# EAGLE board Little-Wire (EAGLE 6.5.0)
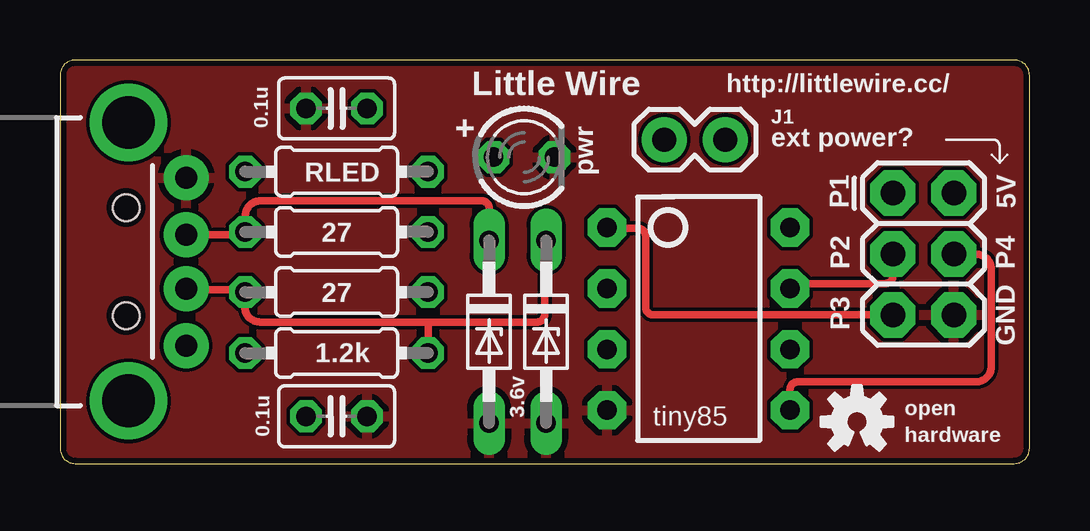
[diagram p0: board, top side]
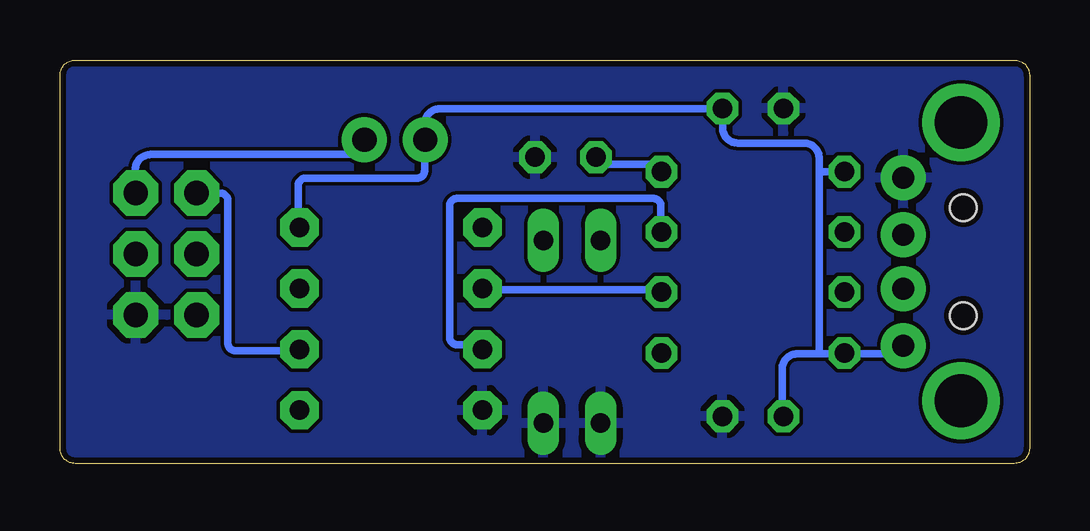
[diagram p1: board, bottom side, seen from below]

Size 40.4 x 16.82 mm. Coordinates in mm from the lower left corner, seen from the top.
Outline: 39.76,0 arc90 40.4,0.64 40.4,16.18 arc90 39.76,16.82 0.64,16.82 arc90 0,16.18 0,0.64 arc90 0.64,0 39.76,0
Copper layers (1*16): Top 0.0356mm / dielectric 1.5011mm / Bottom 0.0356mm
Design rules "OSHPark *": minimum track width 12mil, minimum drill 13mil, track to track 6mil, track to pad 6mil, pad to pad 6mil, via to via 6mil, smd to smd 6mil, copper to edge 10mil, drill to drill 6mil, minimum pad ring 10mil, minimum via ring 7mil, stop-mask expansion 3mil, vias tented up to drill 0mil, thermal gap 10mil
vRestrict: area 16.8,3.9 to 21.3,7.1; area 18.7,1.9 to 19.5,3.8; area 24.6,1.2 to 28.7,2.7; area 24.5,9 to 26.2,10.7; area 31.9,0.5 to 39.6,3.3; area 39,4.8 to 39.8,7.1; area 39,8.1 to 39.7,9.4; area 38.9,10.6 to 39.9,12; area 32.1,10.5 to 33.3,12.1; area 32.1,8 to 33,9.5; area 32.1,5.5 to 32.9,6.9; area 29.6,14.1 to 30.6,14.9; 8 more areas

## Footprints (pad centres in the part's own frame; a part is rotated, then mirrored left to right if it is on the bottom)
C025-025X050 = drill 0.813 octagon: 1 -1.27,0; 2 1.27,0
DO34Z7 = drill 0.813 long: A 3.81,0; C -3.81,0
2X3 = drill 1.016 pad 1.88 octagon: 1 0,0; 2 0,2.54; 3 2.54,0; 4 2.54,2.54; 5 5.08,0; 6 5.08,2.54
1X02 = drill 1.016 pad 1.88: 1 0,0; 2 2.54,0
LED3MM = drill 0.813 octagon: A -1.27,0; K 1.27,0
0204/7 = drill 0.813 octagon: 1 -3.81,0; 2 3.81,0
DIP08 = drill 0.813 pad 1.6 octagon: 1 -3.81,-3.81; 2 -1.27,-3.81; 3 1.27,-3.81; 4 3.81,-3.81; 5 3.81,3.81; 6 1.27,3.81; 7 -1.27,3.81; 8 -3.81,3.81
USB-A-H = drill 0.914 pad 1.88: D+ 2.4,1.127; D- 2.4,-1.127; GND 2.4,3.5; VBUS 2.4,-3.5 | drill 2.2: GND2 0,-5.8; GND3 0,5.8 | hole 1.1: -0.1,2.25; -0.1,-2.25

## Placement (x,y rotation side)
C1  100n  [C025-025X050]  11.53,14.8 0 top
C2  100n  [C025-025X050]  11.53,1.97 180 top
D1  3.6V  [DO34Z7]  17.88,5.49 270 top
D2  3.6V  [DO34Z7]  20.26,5.49 270 top
J1  AVR_SPI_PRG_6PTH  [2X3]  34.7,11.27 270 top
JP1  [1X02]  25.18,13.49 0 top
LED1  [LED3MM]  19.34,12.76 0 top
R1  27  [0204/7]  11.53,9.65 0 top
R2  27  [0204/7]  11.53,7.14 0 top
R3  1.2k  [0204/7]  11.53,4.6 180 top
R4  150  [0204/7]  11.53,12.16 180 top
U$1  OSHW-LOGOS  [OSHW-LOGO-S]  33.21,1.75 0 top
UC  ATTINY45DIP8  [DIP08]  26.61,6.03 270 top
X1  USB-A-H  [USB-A-H]  2.86,8.41 0 top

## Library data of the parts
C1 C2 = rcl
D1 D2 = diode
J1 JP1 U$1 UC X1 = SparkFun
LED1 = led
R1-R4 = resistor

## Nets
D+: D1.C R1.1 X1.D+
D-: D2.C R2.1 R3.1 X1.D-
GND: C1.1 C2.1 D1.A D2.A J1.6 LED1.K UC.4 X1.GND
N$1: R2.2 UC.2
N$2: R1.2 UC.3
N$3: LED1.A R4.1
PIN1: J1.1 UC.6
PIN2: J1.3 UC.7
PIN3: J1.5 UC.1
PIN4: J1.4 UC.5
VCC: C1.2 C2.2 JP1.1 R3.2 R4.2 UC.8 X1.VBUS
VCC_HEADER: J1.2 JP1.2

## Tracks (layer width: path | path; a pad name or v marks a point on that pad's centre or on a via)
D+
  Top 0.305: X1.D+ 5.33,9.53 7.62,9.53 R1.1 7.7,9.71 7.72,9.91 7.72,10.31 arc-90 8.36,10.95 17.57,10.95 arc-90 17.88,10.63 17.88,9.62 17.83,9.43 D1.C
D-
  Top 0.305: X1.D- 5.33,7.24 7.62,7.24 R2.1 7.7,7.26 7.7,6.53 arc90 8.34,5.9 15.34,5.9 | 15.34,5.9 15.34,4.95 R3.1 | 15.34,5.9 19.88,5.9 arc90 20.19,6.21 20.19,9.14 D2.C
GND
  pour Top: 40.4,16.79 40.56,-0.02 0.01,-0.02 -0.15,16.87
  pour Bottom: -0.06,-0.01 40.41,-0.01 40.41,16.84 -0.06,16.84
N$1
  Bottom 0.305: R2.2 15.62,7.24 22.48,7.24 UC.2
N$2
  Bottom 0.305: R1.2 15.32,9.61 15.32,9.69 15.36,9.69 15.36,10.73 arc-90 15.68,11.05 23.85,11.05 arc-90 24.16,10.73 24.16,5.27 arc-90 23.85,4.95 22.86,4.95 UC.3
N$3
  Bottom 0.305: R4.1 15.32,12.19 15.32,12.47 18.07,12.47 LED1.A
PIN1
  Bottom 0.305: J1.1 33.72,11.27 arc90 33.4,10.95 33.4,5.02 arc-90 33.08,4.7 30.42,4.7 UC.6
PIN2
  Top 0.305: J1.3 34.7,7.82 arc-90 34.38,7.5 30.5,7.5 30.5,7.3 UC.7
PIN3
  Top 0.305: J1.5 24.72,6.19 arc-90 24.4,6.51 24.4,9.48 arc90 24.08,9.8 22.8,9.8 UC.1
PIN4
  Top 0.305: J1.4 38.16,8.73 arc-90 38.8,8.1 38.8,4.04 arc-90 38.16,3.4 30.73,3.4 arc90 30.42,3.08 UC.5
VCC
  Bottom 0.305: X1.VBUS 5.33,4.57 7.62,4.57 R3.2 8,4.57 8.76,4.57 | 8.76,4.57 9.67,4.57 arc-90 10.31,3.94 10.31,2.29 C2.2 | 8.76,12.16 8.76,12.72 arc-90 9.4,13.35 12.16,13.35 arc90 12.79,13.99 12.79,14.78 C1.2 12.92,14.78 arc6 12.99,14.78 24.57,14.78 arc-90 25.21,14.14 25.21,13.72 25.15,13.72 JP1.1 25.23,13.34 25.21,13.34 25.21,12.21 arc90 25.53,11.89 30.16,11.89 arc-90 30.48,11.57 30.48,9.91 UC.8 | 8.76,12.16 8.76,4.57 | 8.76,12.16 R4.2 7.7,12.16
VCC_HEADER
  Bottom 0.305: JP1.2 27.81,13.72 27.81,12.88 36.62,12.88 arc-90 37.26,12.24 37.26,11.43 J1.2

## Text on the board
tNames: Little Wire | http://littlewire.cc/ | 0.1u | pwr | J1 | + | ext power? | RLED | P1 | 5V | 27 | P2 | P4 | 27 | P3 | GND | 1.2k | 3.6v | tiny85 | open | 0.1u | hardware